# EAGLE board STM32F050F Base_Routed_Poly (EAGLE 6.0)
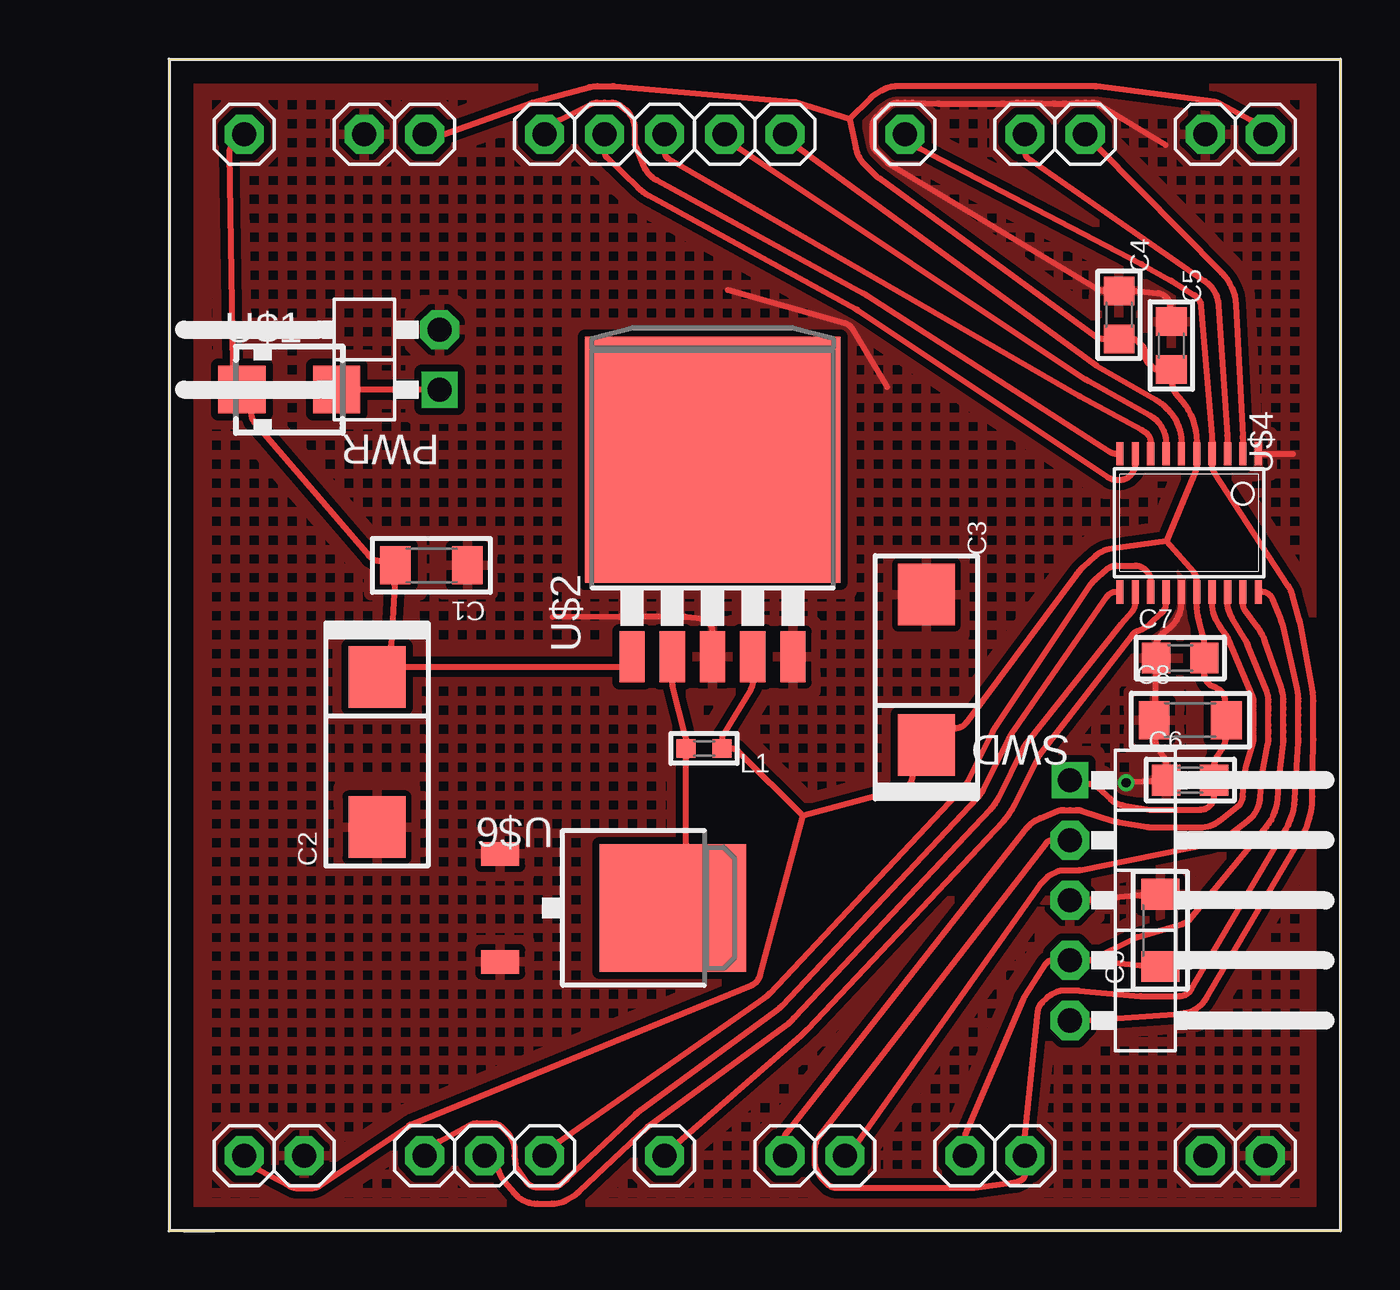
[diagram p0: board, top side]
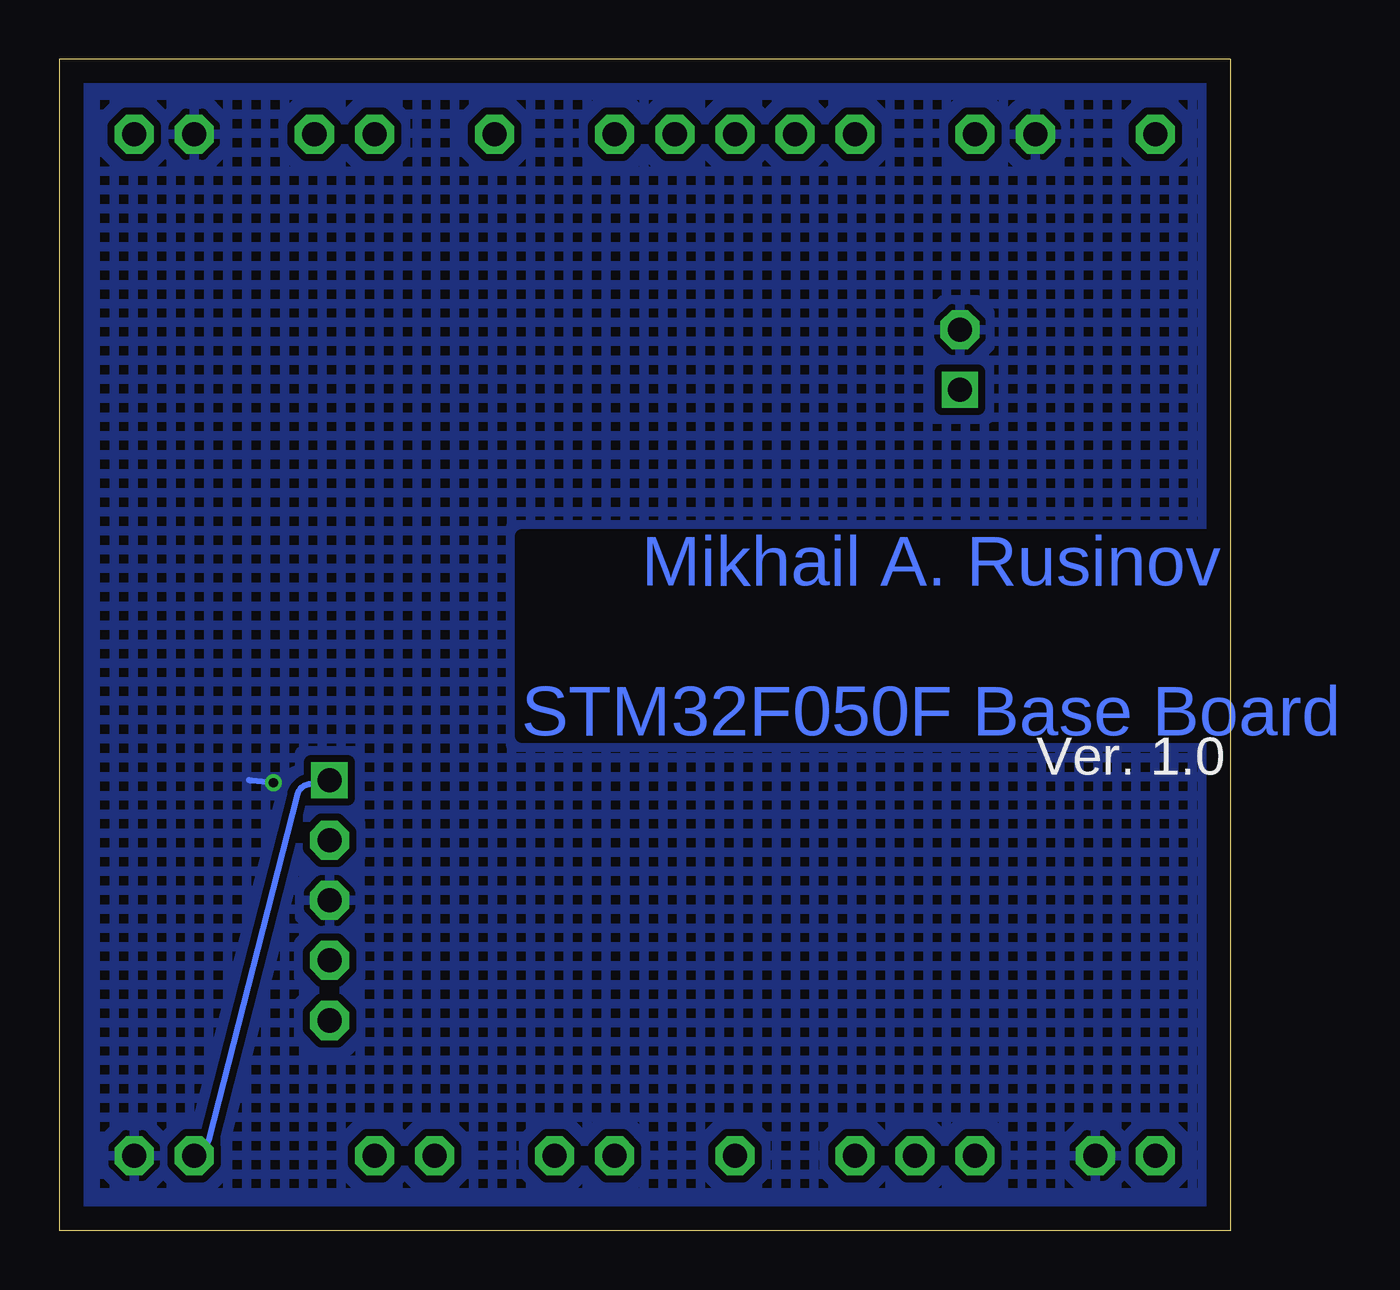
[diagram p1: board, bottom side, seen from below]

Size 49.53 x 49.53 mm. Coordinates in mm from the lower left corner, seen from the top.
Outline: 0,49.52 0,0 49.53,0 49.53,49.52
Outline: 0,49.53 49.53,49.53
Copper layers 1+16: Top 0.035mm / dielectric 0.15mm / Bottom 0.035mm
Design rules: minimum track width 0.254mm, track to track 0.3048mm, copper to edge 1.016mm, minimum pad ring 0.1mm, minimum via ring 0.1mm
Net classes: 0 default: width 0.254 mm, clearance 0.305 mm

## Footprints (pad centres in the part's own frame; a part is rotated, then mirrored left to right if it is on the bottom)
rc-master-smd$ = smd 1.3 x 1.6: 1 -1.524,0; 2 1.524,0
rc-master-smd$' = smd 2.6 x 2.4: + 3.175,0; - -3.175,0
rc-master-smd$'' = smd 1.2 x 1.3: 1 -1.016,0; 2 1.016,0
rc-master-smd$''' = smd 0.8 x 0.8: 1 -0.762,0; 2 0.762,0
pinhead-2$ = drill 1.016 pad 1.524 square: 1 -2.54,-3.81 | drill 1.016 pad 1.649 octagon: 2 0,-3.81
pinhead-2$' = drill 1.016 pad 1.524 square: 1 -5.08,-3.81 | drill 1.016 pad 1.649 octagon: 2 -2.54,-3.81; 3 0,-3.81; 4 2.54,-3.81; 5 5.08,-3.81
my-library$ = smd 2 x 2: A 2,0; C -2,0
my-library$' = smd 1.067 x 2.159: 1 -3.404,-5.791; 2 -1.702,-5.791; 3 0,-5.791; 4 1.702,-5.791; 5 3.404,-5.791 | smd 10.8 x 10.41: 6 0,2.54
my-library$'' = drill 1.016 pad 1.649 octagon: +12V 3.175,46.355; GND1 8.255,46.355; GND2 43.815,46.355; GND3 46.355,3.175; GND4 5.715,3.175; NRST 31.115,46.355; PA0 26.035,46.355; PA1 23.495,46.355; PA2 20.955,46.355; PA3 18.415,46.355; PA4 15.875,46.355; PA5 10.795,3.175; PA6 13.335,3.175; PA7 15.875,3.175; PA9 26.035,3.175; PA10 28.575,3.175; PA13 33.655,3.175; PA14 36.195,3.175; PB1 20.955,3.175; PF0 38.735,46.355; PF1 36.195,46.355; VDD1 10.795,46.355; VDD2 46.355,46.355; VDD3 43.815,3.175; VDD4 3.175,3.175
STM32F0$ = smd 0.305 x 0.991: 1 -2.925,-2.918; 2 -2.275,-2.918; 3 -1.625,-2.918; 4 -0.975,-2.918; 5 -0.325,-2.918; 6 0.325,-2.918; 7 0.975,-2.918; 8 1.625,-2.918; 9 2.275,-2.918; 10 2.925,-2.918; 11 2.925,2.918; 12 2.275,2.918; 13 1.625,2.918; 14 0.975,2.918; 15 0.325,2.918; 16 -0.325,2.918; 17 -0.975,2.918; 18 -1.625,2.918; 19 -2.275,2.918; 20 -2.925,2.918
my-library$''' = smd 1 x 1.6: 1 -2.28,-6.07; 2 2.28,-6.07 | smd 5.4 x 6.2: 3 0,1.23

## Placement (x,y rotation side)
C1  4.7uF  [rc-master-smd$]  11.09,28.13 180 top
C2  100uF 20V  [rc-master-smd$']  8.79,20.24 90 top
C3  330uF 6.3V  [rc-master-smd$']  32.02,23.72 270 top
C4  0.01uf  [rc-master-smd$'']  40.17,38.72 270 top
C5  1uf  [rc-master-smd$'']  42.38,37.42 270 top
C6  0.1uF  [rc-master-smd$'']  43.18,19.05 0 top
C7  0.1uF  [rc-master-smd$'']  42.76,24.21 0 top
C8  4.7uF  [rc-master-smd$]  43.18,21.59 0 top
C9  [rc-master-smd$]  41.91,12.7 90 top
L1  L_0603  [rc-master-smd$''']  22.62,20.39 180 top
PWR  [pinhead-2$]  7.62,38.1 90 top
SWD  [pinhead-2$']  41.91,13.97 270 top
U$1  10MQ040  [my-library$]  5.08,35.56 0 top
U$2  LM2596S  [my-library$']  22.98,30.05 0 top
U$3  [my-library$'']  0,0 0 top
U$4  STM32F050F4P6  [STM32F0$]  43.13,29.93 180 top
U$6  30WQ03  [my-library$''']  20.07,13.65 270 top

## Library data of the parts
C1 C8 C9 = $C1206
C2 C3 = $C7343/T
C4-C7 = $C0805
L1 = $L0603
PWR = $1X02/90-S
SWD = $1X05/90-S
U$1 = $SMA
U$2 = $TO263-5
U$3 = $STM32_BASE_MINI
U$4 = $TSSOP20
U$6 = $TO252

## Nets
+3V3: C3.+ C4.2 C5.2 C6.2 C7.2 C8.2 L1.1 SWD.1 U$2.4 U$3.VDD1 U$3.VDD2 U$3.VDD3 U$3.VDD4 U$4.5 U$4.16
+12V: C1.2 C2.+ U$1.C U$2.1 U$3.+12V
GND: C1.1 C2.- C3.- C4.1 C5.1 C6.1 C7.1 C8.1 C9.2 PWR.2 SWD.3 U$2.3 U$2.5 U$3.GND1 U$3.GND2 U$3.GND3 U$3.GND4 U$4.1 U$4.15 U$6.1 U$6.2
N$23: PWR.1 U$1.A
N$34: L1.2 U$2.2 U$6.3
NRST: SWD.5 U$3.NRST U$4.4
PA0: U$3.PA0 U$4.6
PA1: U$3.PA1 U$4.7
PA2: U$3.PA2 U$4.8
PA3: U$3.PA3 U$4.9
PA4: U$3.PA4 U$4.10
PA5: U$3.PA5 U$4.11
PA6: U$3.PA6 U$4.12
PA7: U$3.PA7 U$4.13
PA9: U$3.PA9 U$4.17
PA10: U$3.PA10 U$4.18
PA13: C9.1 SWD.4 U$3.PA13 U$4.19
PA14: SWD.2 U$3.PA14 U$4.20
PB1: U$3.PB1 U$4.14
PF0: U$3.PF0 U$4.2
PF1: U$3.PF1 U$4.3

## Tracks (layer width: path | path; a pad name or v marks a point on that pad's centre or on a via)
+3V3
  Top 0.254: 42.16,29.16 39.87,28.84 arc34 39.15,28.51 38.66,28.07 arc11 38.38,27.76 33.71,21.48 arc-53 33.22,21.23 33.09,21.23 C3.+ 31.43,19.37 31.43,19.25 arc-75 30.98,18.66 26.8,17.54 | 28.76,47.01 29.04,45.75 arc33 29.4,45.09 29.85,44.64 arc9 30.01,44.51 39.17,37.82 arc36 39.52,37.7 39.65,37.7 C4.2 40.69,37.7 40.82,37.7 41.12,37.45 arc-56 41.27,37.05 | U$3.VDD2 45.91,46.8 45.82,46.89 | 45.82,46.89 | 45.82,46.89 arc17 45.74,46.95 44.42,47.66 arc21 44.21,47.72 39.22,48.38 arc7 39.05,48.39 38.42,48.39 | 38.42,48.39 | 38.42,48.39 37.8,48.39 | 37.8,48.39 | 37.8,48.39 37.47,48.39 | 37.47,48.39 | 37.47,48.39 36.51,48.39 | 36.51,48.39 | 36.51,48.39 35.88,48.39 | 35.88,48.39 | 35.88,48.39 35.2,48.39 | 35.2,48.39 | 35.2,48.39 32.57,48.39 | 32.57,48.39 | 32.57,48.39 31.43,48.39 | 31.43,48.39 | 31.43,48.39 30.8,48.39 arc31 30.15,48.21 29.89,48.05 arc13 29.64,47.86 28.76,47.01 | U$3.VDD1 11.43,46.35 11.56,46.35 arc20 11.66,46.37 15.35,47.69 arc-5 15.4,47.71 17.77,48.34 arc-15 18.1,48.39 18.73,48.39 arc-5 18.84,48.38 26.4,47.72 arc-12 26.53,47.7 28.76,47.01 | U$3.VDD4 3.62,2.73 3.71,2.64 | 3.71,2.64 | 3.71,2.64 arc17 3.79,2.58 5.11,1.88 arc28 5.4,1.8 6.03,1.8 arc34 6.37,1.91 10.14,4.44 arc-12 10.25,4.5 24.63,10.39 arc53 24.99,10.79 26.8,17.54 | 26.8,17.54 24.07,20.27 arc45 23.78,20.39 23.66,20.39 L1.1 23.38,20.66 23.38,20.79 arc-31 23.44,21 24.6,22.9 arc31 24.68,23.18 24.68,23.31 U$2.4 | SWD.1 38.73,18.9 38.86,18.9 arc-43 39.27,18.74 39.82,18.23 arc33 40.31,17.99 41.46,17.8 arc10 41.56,17.79 42.76,17.79 42.77,17.79 43.6,17.8 arc89 44.2,18.4 44.2,18.53 C6.2 44.2,19.57 44.2,19.7 arc-32 44.29,20.02 44.57,20.46 arc32 44.66,20.79 44.66,20.92 C8.2 44.66,22.26 44.66,22.39 44.66,22.45 arc63 44.28,22.95 44.16,23 arc-69 43.78,23.56 43.78,23.69 C7.2 43.78,24.73 43.78,24.86 arc15 43.76,25.01 43.55,25.82 arc-15 43.45,26.52 43.45,26.64 U$4.16 43.45,27.38 43.45,27.51 arc41 43.33,27.84 42.16,29.16
  Top 0.254: 41.27,37.05 | 41.27,37.05 arc56 41.43,36.66 41.73,36.4 41.86,36.4 C5.2 42.42,35.93 42.42,35.8 arc40 42.56,35.41 42.82,35.1 arc-40 43.45,33.34 43.45,33.22 U$4.5 43.45,32.48 43.45,32.35 arc-23 43.42,32.16 42.16,29.16
  Bottom 0.254: U$3.VDD3 43.37,3.62 43.28,3.71 | 43.28,3.71 | 43.28,3.71 arc-31 43.19,3.86 39.45,18.44 arc76 38.86,18.9 38.73,18.9 SWD.1
+12V
  Top 0.254: U$3.+12V 2.73,45.91 2.64,45.82 | 2.64,45.82 | 2.64,45.82 arc46 2.54,45.59 2.69,36.57 2.69,36.56 2.69,36.43 U$1.C 3.47,34.69 3.47,34.56 arc41 3.62,34.16 8.45,28.53 arc49 8.92,28.32 9.04,28.32 C1.2 9.53,27.46 9.53,27.33 arc-3 9.53,27.3 9.38,24.75 arc3 9.38,24.71 9.38,24.59 C2.+ 9.86,23.84 9.99,23.84 19.04,23.84 19.17,23.84 U$2.1
GND  (via drill 0.4 pad 0.7)
  Top 0.254: C9.2 41.24,14.18 41.11,14.18 arc6 41.05,14.18 38.89,13.97 arc-6 38.86,13.97 38.73,13.97 SWD.3 | U$2.3 22.98,25.21 22.98,25.34 arc83 22.51,25.87 21.89,25.94 arc7 21.81,25.95 19.04,25.95 16.23,25.94 | C5.1 42.34,38.91 42.34,39.04 arc84 41.79,39.64 40.88,39.73 arc6 40.82,39.74 40.69,39.74 C4.1 39.65,39.74 39.52,39.74 arc-31 39.21,39.82 30.48,45.07 arc-14 30.37,45.16 29.92,45.61 arc-45 29.74,46.04 29.74,46.67 arc-45 29.92,47.1 30.14,47.33 arc-7 30.2,47.37 30.45,47.57 arc-39 30.81,47.69 30.92,47.69 arc2 30.99,47.69 31.1,47.69 arc-2 31.13,47.69 31.24,47.69 arc2 31.3,47.69 31.42,47.69 arc-3 31.45,47.69 32.51,47.65 arc2 32.57,47.65 35.2,47.65 arc4 35.32,47.65 35.84,47.69 arc-5 35.89,47.69 36,47.69 arc2 36.07,47.69 36.18,47.69 arc-2 36.21,47.69 36.32,47.69 arc2 36.39,47.69 36.5,47.69 arc-4 36.53,47.69 37.38,47.65 arc2 37.47,47.65 37.8,47.65 arc4 37.94,47.65 38.38,47.69 arc-5 38.43,47.69 38.54,47.69 arc2 38.61,47.69 38.72,47.69 arc-2 38.75,47.69 38.86,47.69 arc2 38.93,47.69 39.04,47.69 arc-32 39.35,47.6 42.14,45.91 | v40.47,18.94 41.52,19.01 arc-4 41.56,19.01 41.69,19.01 C6.1 42.16,19.57 42.16,19.7 arc32 42.07,20.02 41.79,20.46 arc-32 41.7,20.79 41.7,20.92 C8.1 41.7,22.26 41.7,22.39 arc-2 41.7,22.41 41.74,23.54 arc2 41.74,23.56 41.74,23.69 C7.1 41.74,24.73 41.74,24.86 41.89,25.12 arc-22 42.02,25.27 42.31,25.5 arc52 42.8,26.52 42.8,26.64 U$4.15 | U$4.1 46.08,32.85 46.21,32.85 47.53,32.85 | 23.63,39.77 28.55,38.38 arc-43 28.9,38.11 30.36,35.67
  Bottom 0.254: v40.47,18.94 41.39,19.03 arc9 41.46,19.04 41.51,19.05
  pour Top (hatched): 49.48,0 49.48,49.38 0.2,49.38 0.2,0
  pour Bottom (hatched): 49.67,-0.1 49.67,49.48 -0.1,49.48 -0.1,-0.1
N$23
  Top 0.254: PWR.1 10.79,35.56 10.67,35.56 8.08,35.56 7.95,35.56 U$1.A
N$34
  Top 0.254: U$6.3 21.86,16.22 21.86,16.35 21.86,19.99 21.86,20.12 L1.2 21.86,20.66 21.86,20.79 arc14 21.85,20.89 21.3,23.05 arc-14 21.28,23.18 21.28,23.31 U$2.2
NRST
  Top 0.254: U$3.NRST 31.56,45.91 31.65,45.82 | 31.65,45.82 | 31.65,45.82 arc17 31.73,45.76 41.1,40.88 arc-2 41.12,40.87 42.37,40.17 arc-3 42.42,40.14 43.35,39.55 arc-53 43.64,39.09 44.09,33.63 arc-5 44.1,33.34 44.1,33.22 U$4.4 44.1,32.48 44.1,32.35 arc33 44.19,32.08 47.34,27.25 arc-17 47.5,26.88 47.8,25.82 arc-5 47.88,25.49 48.34,22.93 arc-10 48.39,22.39 48.39,20.79 arc-1 48.39,20.75 48.35,18.35 arc-30 47.86,16.59 43.87,9.84 arc-55 42.81,9.18 38.89,8.89 arc-4 38.86,8.89 38.73,8.89 SWD.5
PA0
  Top 0.254: U$3.PA0 26.48,45.91 26.57,45.82 | 26.57,45.82 | 26.57,45.82 arc9 26.61,45.78 39.16,36.61 arc6 39.22,36.58 41.73,35.13 arc-15 42.16,34.8 42.23,34.72 arc-45 42.8,33.34 42.8,33.22 U$4.6
PA1
  Top 0.254: U$3.PA1 23.94,45.91 24.03,45.82 | 24.03,45.82 | 24.03,45.82 arc11 24.08,45.78 38.77,35.98 arc5 38.86,35.93 41.48,34.47 arc-38 42.04,33.84 42.07,33.78 arc-23 42.16,33.34 42.16,33.22 U$4.7
PA2
  Top 0.254: U$3.PA2 20.95,45.72 20.95,45.59 arc60 21.11,45.32 38.48,35.3 arc1 38.52,35.27 41.13,33.85 arc-4 41.17,33.83 41.28,33.76 arc-57 41.51,33.34 41.51,33.22 U$4.8
PA3
  Top 0.254: U$3.PA3 18.41,45.72 18.41,45.59 arc46 18.51,45.37 19.82,44.1 arc15 20.27,43.77 29.03,38.98 arc-5 29.13,38.91 39.71,31.85 arc34 40.05,31.74 40.2,31.74 arc47 40.65,31.94 40.72,32.02 arc43 40.85,32.35 40.85,32.48 U$4.9
PA4
  Top 0.254: U$3.PA4 16.32,46.8 16.41,46.89 | 16.41,46.89 | 16.41,46.89 arc-18 16.5,46.95 17.84,47.63 arc-28 18.11,47.69 18.21,47.69 arc1 18.25,47.69 18.27,47.69 arc1 18.3,47.69 18.41,47.69 arc-2 18.43,47.69 18.54,47.69 arc2 18.61,47.69 18.72,47.69 arc-39 19.08,47.57 19.33,47.37 arc-26 19.5,47.16 19.63,46.9 arc-26 19.68,46.67 19.68,46.04 arc22 19.72,45.85 20.02,45.1 arc40 20.62,44.41 29.38,39.62 arc-4 29.51,39.55 39.78,32.93 arc33 40.05,32.85 40.18,32.85 U$4.10
PA5
  Top 0.254: U$3.PA5 11.24,3.62 11.33,3.71 | 11.33,3.71 | 11.33,3.71 arc-17 11.41,3.77 12.73,4.47 arc-28 13.02,4.55 13.65,4.55 arc-45 14.08,4.37 14.3,4.14 arc-19 14.42,3.98 14.55,3.71 arc-26 14.61,3.49 14.61,3.17 arc7 14.61,3.11 14.65,2.8 arc27 14.73,2.59 14.9,2.34 arc2 14.91,2.32 15.1,2.07 arc55 15.57,1.84 15.68,1.84 arc-2 15.75,1.84 15.86,1.84 arc2 15.89,1.84 16,1.84 arc-2 16.07,1.84 16.18,1.84 arc39 16.54,1.96 16.79,2.16 arc5 16.83,2.19 19.71,4.92 arc-7 19.84,5.02 25.63,9.27 arc10 25.92,9.52 34.2,18.32 arc17 34.42,18.64 35.48,20.74 arc-8 35.63,21 39.65,26.8 arc-55 40.05,27.01 40.18,27.01 U$4.11
PA6
  Top 0.254: U$3.PA6 13.78,2.73 13.87,2.64 | 13.87,2.64 | 13.87,2.64 arc-28 13.95,2.51 13.95,2.5 arc23 14.18,2.08 14.59,1.6 arc50 15.56,1.14 16.19,1.14 arc31 16.84,1.32 17.1,1.48 arc13 17.34,1.66 20.22,4.38 arc-7 20.28,4.43 26.07,8.68 arc10 26.45,9.02 34.74,17.82 arc17 35.08,18.31 36.13,20.41 arc-12 36.28,20.65 40.22,25.6 arc-3 40.25,25.64 40.73,26.19 arc41 40.85,26.52 40.85,26.64 U$4.12
PA7
  Top 0.254: U$3.PA7 16.32,3.62 16.41,3.71 | 16.41,3.71 | 16.41,3.71 arc-10 16.46,3.75 25.17,9.85 arc12 25.38,10.03 33.66,18.83 arc17 33.77,18.97 34.82,21.07 arc-7 34.99,21.38 38.93,27.27 arc-14 39.15,27.52 39.65,27.96 arc-42 40.05,28.12 40.85,28.12 arc-47 41.3,27.92 41.37,27.84 arc-43 41.51,27.51 41.51,27.38 U$4.13
PA9
  Top 0.254: U$3.PA9 26.04,3.81 26.04,3.94 arc-38 26.1,4.13 36.28,17.03 arc-30 36.83,17.44 37.59,17.75 arc-29 37.85,17.78 37.89,17.78 arc9 37.97,17.77 38.08,17.78 arc-5 38.12,17.78 38.23,17.77 arc9 38.31,17.78 38.35,17.78 arc-24 38.57,17.76 39.96,17.32 arc8 40.19,17.27 41.34,17.07 arc10 41.56,17.05 43.6,17.05 arc38 44.42,17.34 45.17,17.92 arc48 45.4,18.36 45.45,19 arc-12 45.61,19.86 45.84,20.65 arc19 45.86,20.81 45.85,20.95 arc-5 45.85,21.24 45.86,21.38 arc2 45.86,21.4 45.86,21.78 arc2 45.86,21.8 45.85,21.94 arc-5 45.85,22.23 45.86,22.37 arc25 45.82,22.59 44.79,25.03 arc12 44.74,25.11 44.46,25.52 arc-5 44.37,25.66 44.29,25.8 arc-29 44.1,26.52 44.1,26.64 U$4.17
PA10
  Top 0.254: U$3.PA10 29.02,3.62 29.11,3.71 | 29.11,3.71 | 29.11,3.71 arc10 29.15,3.75 36.84,14.64 arc-10 36.91,14.72 37.13,14.94 arc-19 37.29,15.06 37.56,15.19 arc-26 37.78,15.24 38.42,15.24 arc11 38.52,15.25 44.01,16.36 arc26 44.87,16.76 45.62,17.34 arc48 46.14,18.3 46.19,18.95 arc-7 46.23,19.33 46.47,20.58 arc12 46.49,20.82 46.48,21.01 arc-3 46.48,21.18 46.49,21.37 arc2 46.49,21.4 46.49,21.78 arc2 46.49,21.81 46.48,22 arc-3 46.48,22.17 46.49,22.36 arc24 46.41,22.82 45.62,24.75 arc9 45.53,24.94 44.95,25.92 arc0 44.94,25.93 | 44.94,25.93 | 44.94,25.93 arc-11 44.84,26.13 44.8,26.24 arc-20 44.76,26.52 44.76,26.64 U$4.18
PA13
  Top 0.254: U$3.PA13 33.66,3.81 33.66,3.94 arc-23 33.68,4.06 36.1,9.73 arc-10 36.2,9.93 37.07,11.29 arc-57 37.34,11.43 37.47,11.43 SWD.4 | SWD.4 38.73,11.43 | 38.73,11.43 38.86,11.43 | 38.86,11.43 arc-6 38.89,11.43 41.05,11.22 arc6 41.11,11.22 41.24,11.22 C9.1 | SWD.4 38.73,11.43 | 38.73,11.43 38.86,11.43 | 38.86,11.43 arc26 39,11.46 40.84,12.37 arc-10 40.94,12.41 42.88,12.99 arc34 43.18,13.19 46.4,17.07 arc36 46.87,18.25 46.92,18.89 arc-2 46.93,19 47.11,20.59 arc7 47.12,20.82 47.12,21.05 arc-2 47.12,21.14 47.12,21.37 arc1 47.12,21.4 47.12,21.78 arc1 47.12,21.81 47.12,22.05 arc-2 47.12,22.12 47.12,22.36 arc20 47.02,22.97 46.34,24.93 arc18 46.04,25.5 45.5,26.22 arc-37 45.41,26.52 45.41,26.64 U$4.19
PA14
  Top 0.254: U$4.20 46.08,27.01 46.21,27.01 arc-68 46.66,26.7 46.98,25.93 arc-10 47.13,25.47 47.7,22.91 arc-13 47.75,22.37 47.75,22.1 arc1 47.75,22.07 47.75,21.8 arc0 47.75,21.78 47.75,21.4 arc0 47.75,21.38 47.75,21.11 arc1 47.75,21.08 47.75,20.81 arc-4 47.75,20.65 47.61,18.24 arc-27 47.22,16.97 43.23,10.22 arc-59 42.71,9.92 41.11,9.92 arc-5 41.05,9.92 38.46,10.16 arc5 38.42,10.16 37.78,10.16 arc26 37.56,10.11 37.29,9.98 arc19 37.13,9.86 36.91,9.64 arc39 36.73,9.27 36.2,3.97 arc6 36.2,3.94 36.2,3.81 U$3.PA14 36.2,2.54 36.2,2.41 arc-66 36.01,2.12 35.9,2.08 arc-16 35.74,2.03 34.05,1.81 arc-8 33.97,1.8 28.26,1.8 arc-45 27.83,1.98 27.61,2.21 arc-19 27.49,2.37 27.36,2.63 arc-26 27.3,2.86 27.3,3.49 arc-26 27.36,3.71 27.49,3.98 arc-12 27.55,4.09 37.09,16.39 arc-52 37.34,16.51 37.47,16.51 SWD.2
PB1
  Top 0.254: U$3.PB1 21.4,3.62 21.49,3.71 | 21.49,3.71 | 21.49,3.71 arc-4 21.51,3.73 26.73,8.27 arc6 26.99,8.51 35.27,17.31 arc17 35.74,17.98 36.79,20.09 arc-11 36.86,20.18 40.73,25.18 arc-29 40.93,25.34 41.17,25.45 arc21 41.52,25.69 | 41.52,25.69 | 41.52,25.69 arc-1 41.53,25.7 41.93,26.08 arc3 41.95,26.1 42.02,26.18 arc43 42.16,26.52 42.16,26.64 U$4.14
PF0
  Top 0.254: U$3.PF0 39.18,45.91 39.27,45.82 | 39.27,45.82 | 39.27,45.82 39.28,45.81 44.51,40.5 arc-42 45.11,39.14 45.4,33.59 arc-3 45.41,33.34 45.41,33.22 U$4.2
PF1
  Top 0.254: U$3.PF1 36.2,45.72 36.2,45.59 arc55 36.33,45.33 43.8,40.14 arc-51 44.37,39.13 44.75,33.62 arc-4 44.76,33.34 44.76,33.22 U$4.3

## Text on the board
Bottom: Mikhail A. Rusinov / / STM32F050F Base Board
bPlace: Ver. 1.0